# Altium PCB Onion_Omega_Debug_PCB.PcbDoc
Units mm, origin at the board's own origin, x right, y up, seen from the top; angles counter-clockwise.
Board outline 34.62 x 52.98 mm, 2 copper layers (Top, Bottom), stack 1.071 mm thick; 22 components, 37 nets, 154 pads, 0 vias.
Unrouted connection lines stored in the file: 1.
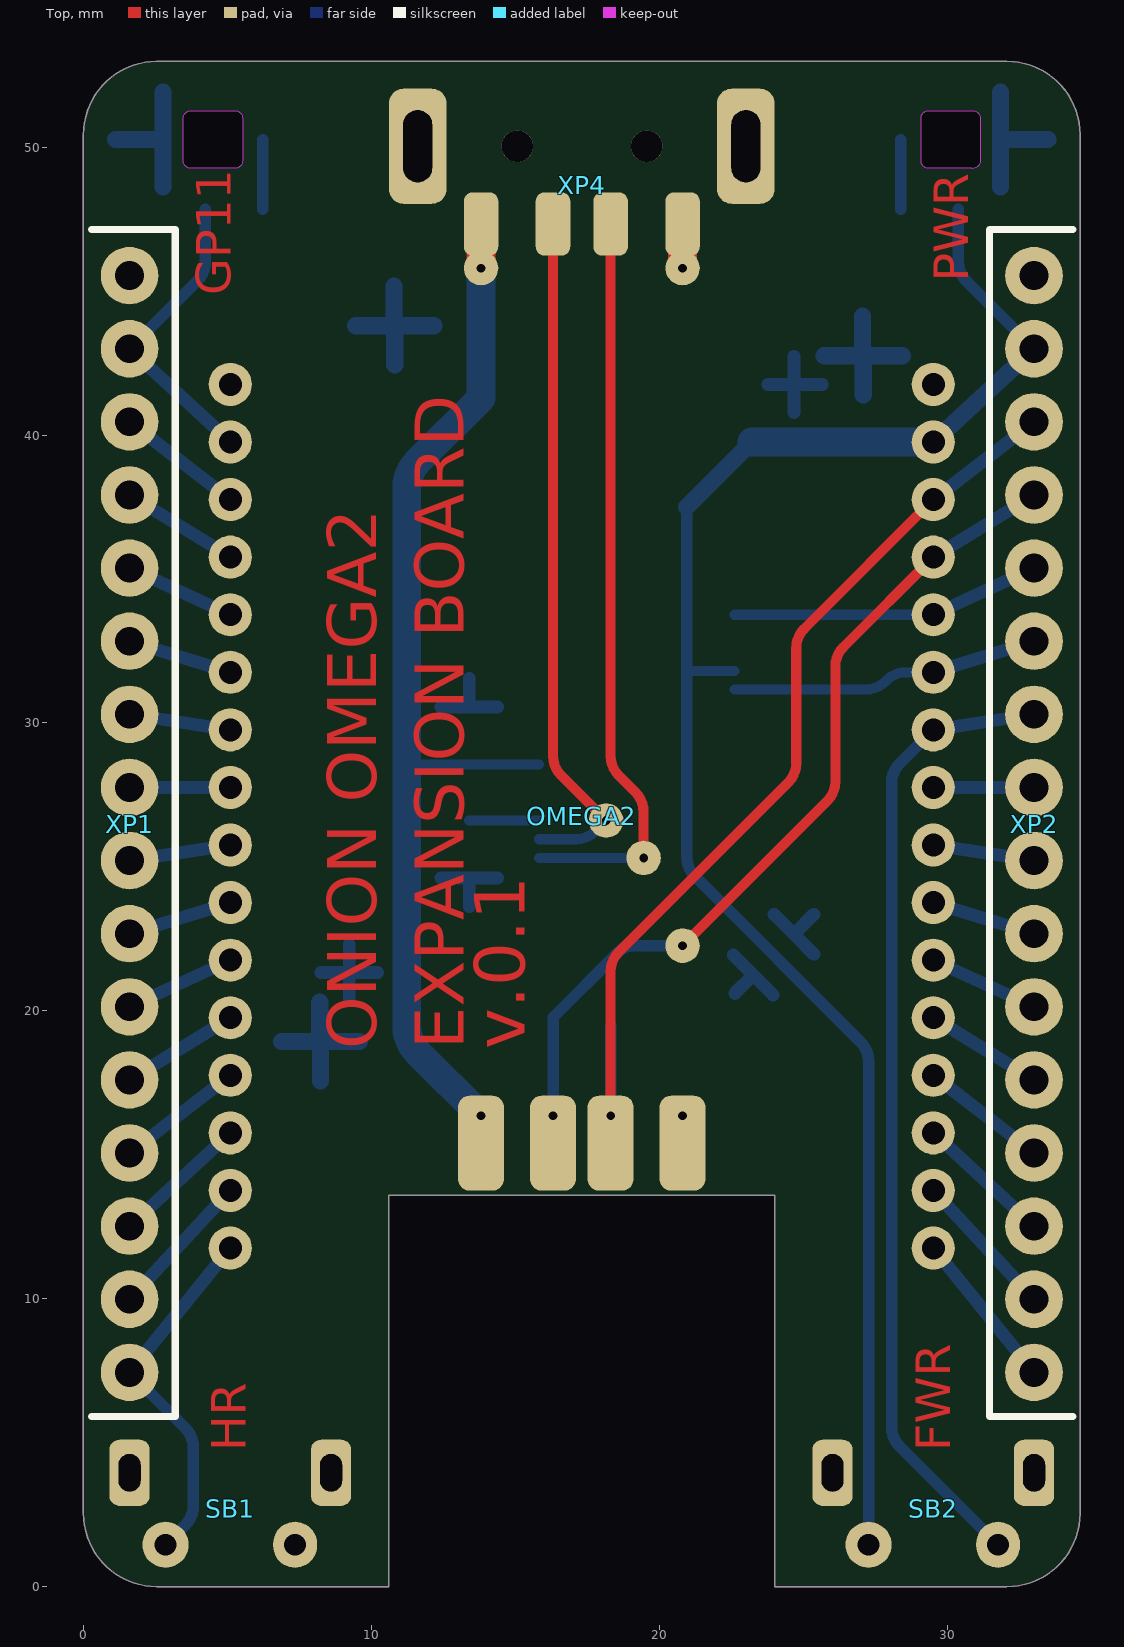
[diagram p0: Top view]
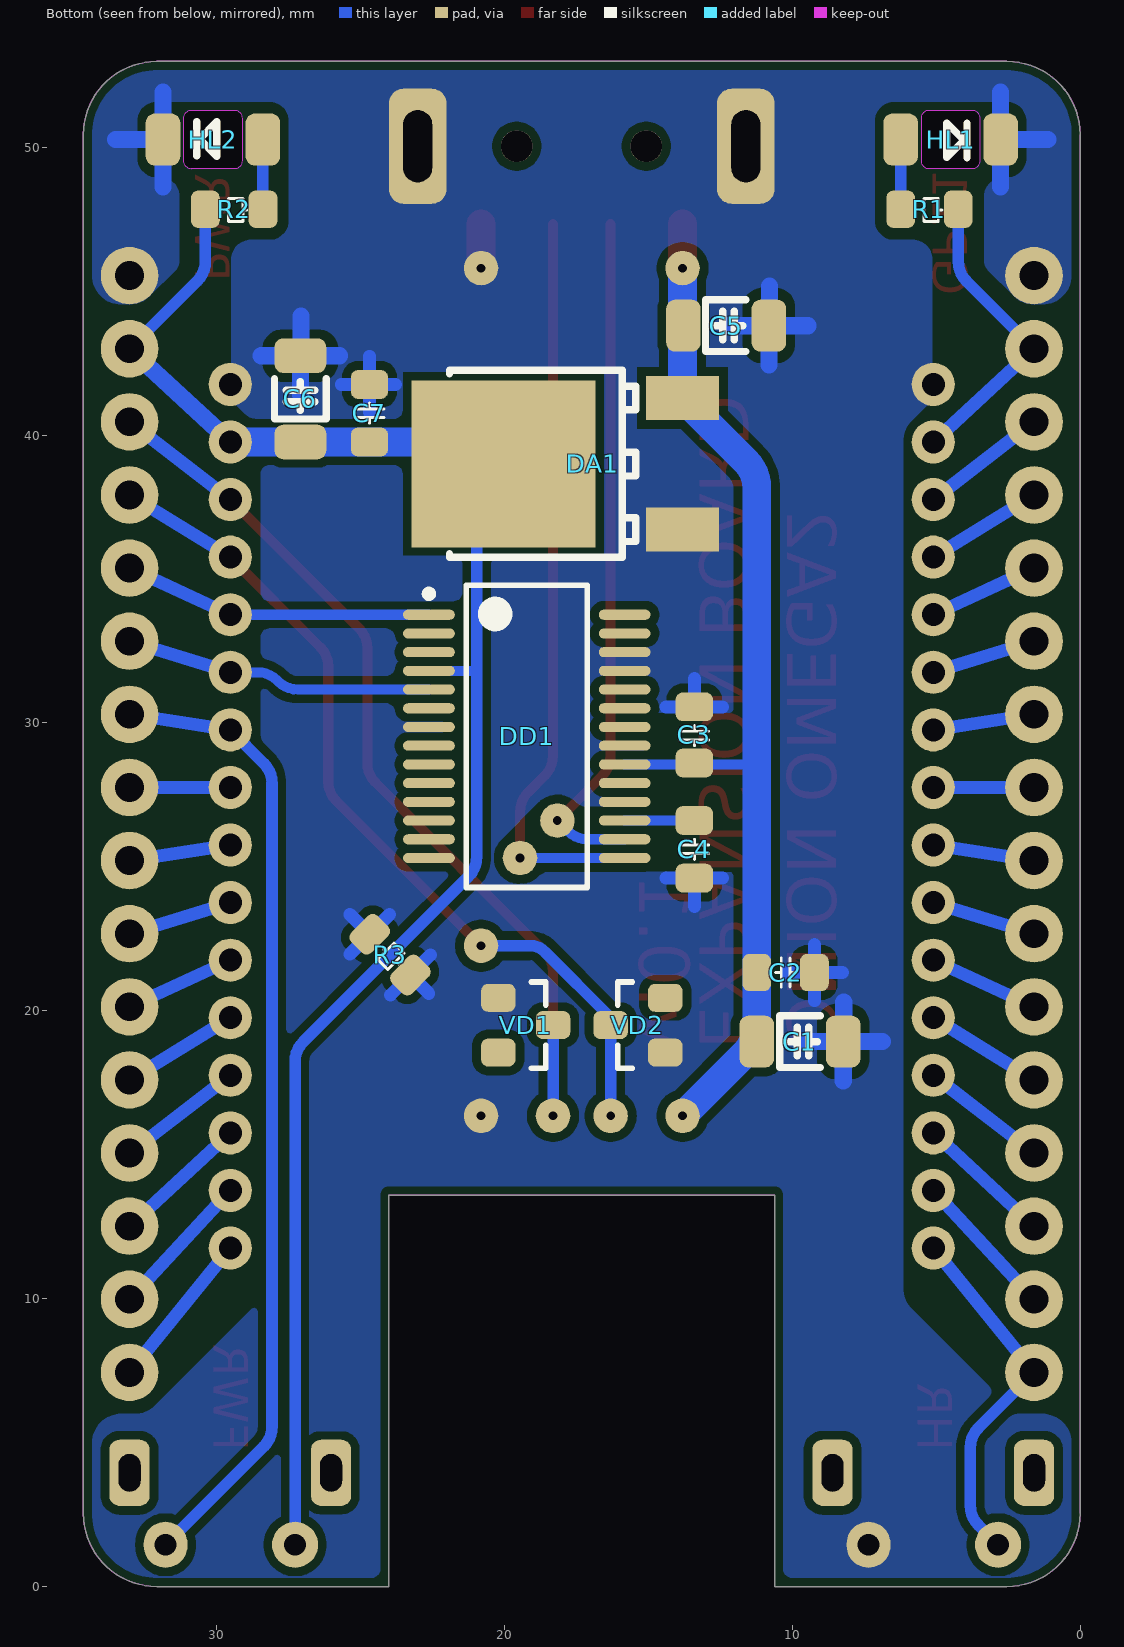
[diagram p1: Bottom view, seen from below]

## Layer stack, top to bottom
Top Solder: solder mask 0.0102, Solder Resist, Dk 3.5
Top: signal copper 0.0356
Dielectric1: core 1, FR-4, Dk 4.8
Bottom: signal copper 0.0356
Bottom Solder: solder mask 0.0102, Solder Resist, Dk 3.5

## Board outline
0,2.54 ccw(c2.54,2.54) 2.54,0 10.61,0 10.61,13.6 24.01,13.6 24.01,0 32.08,0 ccw(c32.08,2.54) 34.62,2.54 34.62,50.436 ccw(c32.08,50.436) 32.08,52.976 2.54,52.976 ccw(c2.54,50.436) 0,50.436
cut-out: 3.468,49.533 3.468,50.999 cw(c3.742,50.999) 3.742,51.273 5.252,51.273 cw(c5.252,50.999) 5.526,50.999 5.526,49.533 cw(c5.252,49.533) 5.252,49.259 3.742,49.259 cw(c3.742,49.533)
cut-out: 29.094,49.533 29.094,50.999 cw(c29.368,50.999) 29.368,51.273 30.878,51.273 cw(c30.878,50.999) 31.152,50.999 31.152,49.533 cw(c30.878,49.533) 30.878,49.259 29.368,49.259 cw(c29.368,49.533)

## Design rules (kind name [scope] priority, off if disabled: settings)
Clearance Clearance_1 [InPolygon] p1: gap=0.3 ignorepadtopadclearanceinfootprint=FALSE except(0: Arc-Hole Track-Hole SMDPad-Hole THPad-Hole Via-Hole Fill-Hole Poly-Hole Region-Hole Text-Hole)
Clearance [All] p2: gap=0.1 ignorepadtopadclearanceinfootprint=FALSE except(0: Arc-Hole Track-Hole SMDPad-Hole THPad-Hole Via-Hole Fill-Hole Poly-Hole Region-Hole Text-Hole)
PlaneConnect [All] p1: planeconnectstyle=Relief reliefexpansion=0.508 reliefentries=4 reliefconductorwidth=0.35 reliefairgap=0.254
PolygonConnect [All] p1: connectstyle=Direct reliefconductorwidth=0.5 reliefentries=4 polygonreliefangle="90 Angle" airgapwidth=0.4
RoutingVias [All] p1: holewidth=0.711 width=1.27 viastyle="Through Hole" minholewidth=0.711 minwidth=1.27 maxholewidth=5 maxwidth=5
SilkToSolderMaskClearance SilkscreenOverComponentPads [IsPad] p1: minsilkscreentomaskgap=0.254 clearancetoexposedcopper=TRUE
SolderMaskExpansion [All] p1: expansion=0.102 istentingtop=FALSE
Width [All] p1: maxlimit=10 minlimit=0.254 preferedwidth=0.254
28 further rules are at their usual default settings.

## Components (designator, comment, footprint, x,y, rotation, side; value= is the part's Value field where it differs from the comment)
C1 "10 мкФ" A-case#1 11.231,18.929 r180 bottom
C2 "100 нФ" CAP0805#1 11.231,21.329 r180 bottom
C3 "100 нФ" CAP0805#2 13.4,28.558 r90 bottom
C4 "100 нФ" CAP0805#1 13.4,24.608 r90 bottom
C5 "10 мкФ" A-case#2 13.81,43.8 r180 bottom
C6 "10 мкФ" A-case#1 27.085,39.758 r90 bottom
C7 "100 нФ" CAP0805#1 24.685,39.758 r90 bottom
DA1 "NCP1117-33G" D-PAK 20.033,39 r90 bottom
DD1 "FT232RL" SSOP-28 19.22,29.533 r180 bottom
HL1 "FYLS-1206 PGC" "LED 1206 GREEN" 5.761,50.264 r180 bottom
HL2 "FYLS-1206 UЕC" "LED 1206 RED" 28.859,50.264 r0 bottom
OMEGA2 "Onion Omega2" Onion_Omega2 29.52,11.758 r90 top
R1 "1,5 кОм" RES0805 4.233,47.843 r0 bottom
R2 "1,5 кОм" RES0805 28.387,47.843 r0 bottom
R3 "0R" RES0805 23.264,21.242 r45 bottom (schematic designator R2)
SB1 "" KLS7-TS6606 5.1,2.7 r0 top
SB2 "" KLS7-TS6606 29.52,2.7 r0 top
VD1 "" SOT-23 18.31,19.5 r180 bottom
VD2 "" SOT-23 16.31,19.5 r0 bottom
XP1 "PBS-16" PBS-16 1.6,7.438 r90 top
XP2 "PBS-16" PBS-16 33.02,7.438 r90 top
XP4 "USBA-M-SM" USBA-M-SM 13.81,47.332 r270 top

## Footprints (in the part's own frame and the unit in brackets; to place one, negate y for a bottom-side part, rotate by r counter-clockwise, add the part's x,y. Pads: shape width x height; smd on the part's side, far side on the other; paste and mask are expansions set on the pad)
A-case#1 [mm]
  rrect50% 1.2x1.8 smd mask-25.4: 1(0,0) 2(3,0)
  silkscreen extent 0.8,-0.9 2.2,0.9, body extent -0.1,-0.8 3.1,0.8, height 1.8
A-case#2 [mm]
  rrect50% 1.2x1.8 smd mask-25.4: 1(0.032,0) 2(3,0)
  silkscreen extent 0.8,-0.9 2.2,0.9, body extent -0.1,-0.8 3.1,0.8, height 1.8
CAP0805#1 [mm]
  rrect50% 1x1.3 smd: 1(0,0) 2(2,0)
  silkscreen extent 0.65,-0.5 1.35,0.5, body extent 0.02,-0.63 2.02,0.62, height 0.78
CAP0805#2 [mm]
  rrect50% 1x1.3 smd: 1(0.048,0) 2(2,0)
  silkscreen extent 0.65,-0.5 1.35,0.5, body extent 0.02,-0.63 2.02,0.62, height 0.78
D-PAK [mil]
  rect 60x100 smd: 1(-90,-245) 3(90,-245)
  rect 228.35x251.97 smd: 2(0,0)
  silkscreen extent -128,-181 128,74, body extent -128,-275 128,124, height 96
KLS7-TS6606 [mm]
  round 1.6 hole 0.762: 1(-2.25,-1.25)
  oval 1.524x1.6 hole 0.762: 2(2.25,-1.25)
  rrect50% 1.4x2.3 hole 0.762 slot 1.3 at 90 deg: 3(3.5,1.25) 4(-3.5,1.25)
  body extent -4.1,-9.7 4.1,2.65, height 7.8
"LED 1206 GREEN" [mm]
  rrect50% 1.2x1.8 smd mask-25.4: 1(-0.472,0) 2(3,0)
  silkscreen extent 1.13,-0.63 1.83,0.58, body extent -0.1,-0.8 3.1,0.8, height 1.1
"LED 1206 RED" [mm]
  rrect50% 1.2x1.8 smd mask-25.4: 1(-0.472,0) 2(3,0)
  silkscreen extent 1.13,-0.63 1.83,0.58, body extent -0.1,-0.8 3.1,0.8, height 1.1
Onion_Omega2 [mm]
  round 1.5 hole 0.8: 1(0,24.42) 2(2,24.42) 3(4,24.42) 4(6,24.42) 5(8,24.42) 6(10,24.42) 7(12,24.42) 8(14,24.42) 9(16,24.42) 10(18,24.42) 11(20,24.42) 12(22,24.42) 13(24,24.42) 14(26,24.42) 15(28,24.42) 16(30,24.42) 17(30,0) 18(28,0) 19(26,0) 20(24,0) 21(22,0) 22(20,0) 23(18,0) 24(16,0) 25(14,0) 26(12,0) 27(10,0) 28(8,0) 29(6,0) 30(4,0) 31(2,0) 32(0,0)
  body extent -5.3,-0.96 37.6,25.44, height 9.4
PBS-16 [mm]
  round 2 hole 1: 1(0,0) 2(2.54,0) 3(5.08,0) 4(7.62,0) 5(10.16,0) 6(12.7,0) 7(15.24,0) 8(17.78,0) 9(20.32,0) 10(22.86,0) 11(25.4,0) 12(27.94,0) 13(30.48,0) 14(33.02,0) 15(35.56,0) 16(38.1,0)
  silkscreen extent -1.53,-1.59 39.7,1.31, body extent -1.24,-1.3 39.4,1.24, height 8.17
RES0805 [mm]
  rrect50% 1x1.3 smd: 1(0,0) 2(2,0)
  silkscreen extent 0.56,-0.38 1.31,0.42, body extent -0.1,-0.6 1.9,0.6, height 0.5
SOT-23 [mm]
  rrect50% 1.2x0.972 smd: 1(-1.9,0.95) 2(-1.9,-0.95) 3(0,0)
  silkscreen extent -0.75,-1.5 -0.25,1.5, body extent -2.15,-1.5 0.15,1.5, height 1.1
SSOP-28 [mm]
  oval 1.8x0.35 smd: 1(-3.4,4.225) 2(-3.4,3.575) 3(-3.4,2.925) 4(-3.4,2.275) 5(-3.4,1.625) 6(-3.4,0.975) 7(-3.4,0.325) 8(-3.4,-0.325) 9(-3.4,-0.975) 10(-3.4,-1.625) 11(-3.4,-2.275) 12(-3.4,-2.925) 13(-3.4,-3.575) 14(-3.4,-4.225) 15(3.4,-4.225) 16(3.4,-3.575) 17(3.4,-2.925) 18(3.4,-2.275) 19(3.4,-1.625) 20(3.4,-0.975) 21(3.4,-0.325) 22(3.4,0.325) 23(3.4,0.975) 24(3.4,1.625) 25(3.4,2.275) 26(3.4,2.925) 27(3.4,3.575) 28(3.4,4.225)
  silkscreen extent -3.52,-5.25 2.1,5.25, body extent -3.9,-5.1 3.9,5.1, height 1.9
USBA-M-SM [mm]
  rrect50% 2.2x1.2 smd paste-25.4: 1(0,0) 2(0,2.5) 3(0,4.5) 4(0,7)
  round 1.1 hole 1.1 unplated: 1mm(-2.7,5.76) 1mm(-2.7,1.26)
  rrect50% 4x2 hole 1 slot 2.5 at 0 deg unplated: 5(-2.7,-2.2) 6(-2.7,9.2)
  body extent -20.4,-2.69 0.3,9.81, height 3.22

## Part data
C1 C5 C6: library part 871, "10 мкФ 10 В 10% тип А", Part number=A-case, ID 1C=871, Mounting method=SMD, Subtype=танталовый, Type=конденсатор
C2 C3 C4 C7: library part 1002, "100 нФ  5% X7R", ID 1C=1002, Mounting method=SMD, Subtype=0805, Type=конденсатор
DA1: library part D0, ID 1C=D0, Part number=NCP1117-33G, Subtype="стабилизатор напряжения", Type=микросхема
DD1: library part 1752, ID 1C=1752, Mounting method=SMD, Part number=FT232RL, Subtype="контроллер интерфейсов", Type=микросхема
HL1: library part 1946, "зеленый сверхяркий", ID 1C=1946, Mounting method=SMD, Part number="FYLS-1206 PGC", Subtype=1206, Type=светодиод
HL2: library part 1053, "красный", ID 1C=1053, Mounting method=SMD, Part number="FYLS-1206 UЕC", Subtype=1206, Type=светодиод
OMEGA2: library part D3, ID 1C=D3, Part number="Onion Omega2", Type=DIY
R1 R2: library part 1788, ID 1C=1788, Mounting method=SMD, Subtype=0805, Type=резистор
R3: library part 1788, "1,5 кОм", ID 1C=1788, Mounting method=SMD, Subtype=0805, Type=резистор
SB1 SB2: library part 2117, "6x6x3.85", Part number=KLS7-TS6606-5.0, ID 1C=2117, Mounting method=THT, Type=кнопка
VD1 VD2: library part 1010, Part number=BZX84-C3V6, ID 1C=1010, Type=стабилитрон
XP1 XP2: library part D2, Part number="PBS-16 2.54mm", ID 1C=D2, Type=разъем
XP4: library part 998, Part number="разъем USBA-M-SM", ID 1C=998, Type=разъем

## Free pads (board coordinates)
  round 1.2 hole 0.3: 2(13.81,16.35) 2(13.81,45.8) 2(16.31,16.35) 2(18.157,26.608) 2(18.31,16.35) 2(19.457,25.308) 2(20.81,22.259) 2(20.81,45.8) 2(20.81,16.35)
  rrect50% 1.6x3.3 smd: 3(13.81,15.4) 3(16.31,15.4) 3(18.31,15.4) 3(20.81,15.4)

## Nets (pads, with @x,y where several pads share a name; then routed paths per layer and width w, separated by ;. In a path a pad name is that pad's centre, name@x,y a point inside that pad or via, vN(x,y) a via of type N, cw(c..) or ccw(c..) an arc to the next point about the centre after c; other vN are vias at no path point)
+3.3V: C6.1 C7.1 DA1.2 DD1.4 OMEGA2.18 R2.2 SB2.1 XP2.15 | length 60.4
  Bottom w0.35: 20.968,31.808 DD1.4
  Bottom w0.4: DA1.2@20.956,37.498 20.956,25.352 ccw(c21.922,25.352) 21.239,24.669 26.987,18.921 cw(c26.305,18.239) 27.27,18.239 SB2.1 ; R2.2 30.387,46.031 ccw(c31.352,46.031) 30.669,45.349 XP2.15
  Bottom w0.6: DA1.2@20.956,37.498 DA1.2@23.216,39.758 ; OMEGA2.18 XP2.15
  Bottom w1: DA1.2@23.216,39.758 OMEGA2.18
+5V: C1.1 C2.1 C3.1 C5.1 DA1.3 DD1.20 pad.2@13.81,16.35 pad.2@13.81,45.8 pad.3@13.81,15.4 XP4.1 | length 37.5
  Top w1: pad.2@13.81,45.8 XP4.1
  Bottom w0.35: 11.371,28.558 DD1.20
  Bottom w1: pad.2@13.81,16.35 11.618,18.542 cw(c12.552,19.476) 11.231,19.476 11.231,38.16 cw(c12.552,38.16) 11.618,39.094 DA1.3 pad.2@13.81,45.8
CS1: OMEGA2.4 XP1.4 | length 4.4
  Bottom w0.45: XP1.4 OMEGA2.4
D+: OMEGA2.19 pad.2@18.31,16.35 pad.3@18.31,15.4 VD1.3 XP2.14 | length 33.5
  Top w0.35: pad.2@18.31,16.35 18.31,21.36 cw(c19.275,21.36) 18.593,22.043 24.478,27.928 ccw(c23.796,28.611) 24.761,28.611 24.761,32.599 cw(c25.726,32.599) 25.044,33.282 OMEGA2.19
  Bottom w0.4: pad.2@18.31,16.35 VD1.3
  Bottom w0.45: OMEGA2.19 XP2.14
D-: OMEGA2.20 pad.2@16.31,16.35 pad.2@20.81,22.259 pad.3@16.31,15.4 VD2.3 XP2.13 | length 30.1
  Top w0.35: pad.2@20.81,22.259 25.835,27.285 ccw(c25.153,27.967) 26.118,27.967 26.118,31.956 cw(c27.083,31.956) 26.401,32.639 OMEGA2.20
  Bottom w0.4: pad.2@16.31,16.35 16.31,19.767 18.594,22.051 cw(c19.098,21.546) 19.098,22.259 pad.2@20.81,22.259
  Bottom w0.45: OMEGA2.20 XP2.13
FW_RST: OMEGA2.23 SB2.2 XP2.10 | length 33.9
  Bottom w0.4: OMEGA2.23 28.355,28.593 ccw(c29.037,27.91) 28.072,27.91 28.072,5.548 ccw(c29.037,5.548) 28.355,4.865 SB2.2
  Bottom w0.45: OMEGA2.23 XP2.10
GND: C1.2 C2.2 C3.2 C4.1 C5.2 C6.2 C7.2 DA1.1 DD1.7 DD1.18 DD1.21 DD1.25 DD1.26 HL1.2 HL2.2 OMEGA2.16 OMEGA2.17 pad.2@20.81,16.35 pad.2@20.81,45.8 pad.3@20.81,15.4 R3.1 R3.2 SB1.2 VD1.1 VD2.1 XP1.16 XP2.16 XP4.4 XP4.5 XP4.6 | length 47.1
  Top w1: pad.2@20.81,45.8 XP4.4
  Bottom w0.448: 8.251,21.329 C2.2 ; 9.231,20.349 C2.2 ; 9.231,22.309 C2.2 ; 10.211,21.329 C2.2 ; 12.42,24.608 C4.1 ; 12.42,30.558 C3.2 ; 13.4,23.628 C4.1 ; 13.4,31.538 C3.2 ; 14.38,24.608 C4.1 ; 14.38,30.558 C3.2 ; 22.571,21.935 R3.1 ; 22.627,20.606 R3.1 ; 23.785,41.758 C7.2 ; 23.957,20.55 R3.1 ; 23.985,23.349 R3.2 ; 24.685,40.778 C7.2 ; 24.685,42.738 C7.2 ; 25.371,21.964 R3.2 ; 25.371,23.349 R3.2 ; 25.665,41.758 C7.2
  Bottom w0.6: 1.121,50.264 HL1.2 ; 2.761,48.624 HL1.2 ; 2.761,51.905 HL1.2 ; 6.875,18.929 C1.2 ; C1.2@8.206,18.943 8.206,20.3 ; 8.231,17.573 C1.2 ; 9.454,43.8 C5.2 ; 9.587,18.929 C1.2 ; C5.2@10.786,43.814 10.786,45.171 ; 10.81,42.444 C5.2 ; 12.166,43.8 C5.2 ; 25.729,42.758 C6.2 ; C6.2@27.061,42.772 27.061,44.129 ; 27.085,41.402 C6.2 ; 28.441,42.758 C6.2 ; 31.859,48.624 HL2.2 ; 31.859,51.904 HL2.2 ; 33.499,50.264 HL2.2
GPIO11: OMEGA2.15 R1.1 XP1.15 | length 10.7
  Bottom w0.4: XP1.15 3.951,45.349 ccw(c3.268,46.031) 4.233,46.031 R1.1
  Bottom w0.45: XP1.15 OMEGA2.15
GPIO15: OMEGA2.10 XP1.10 | length 3.5
  Bottom w0.45: XP1.10 OMEGA2.10
GPIO16: OMEGA2.11 XP1.11 | length 3.7
  Bottom w0.45: XP1.11 OMEGA2.11
GPIO17: OMEGA2.12 XP1.12 | length 3.9
  Bottom w0.45: XP1.12 OMEGA2.12
GPIO18: OMEGA2.29 XP2.4 | length 4.4
  Bottom w0.45: OMEGA2.29 XP2.4
GPIO19: OMEGA2.30 XP2.3 | length 4.8
  Bottom w0.45: OMEGA2.30 XP2.3
I2S_CLK: OMEGA2.14 XP1.14 | length 4.4
  Bottom w0.45: XP1.14 OMEGA2.14
MISO: OMEGA2.7 XP1.7 | length 3.7
  Bottom w0.45: XP1.7 OMEGA2.7
MOSI: OMEGA2.6 XP1.6 | length 3.9
  Bottom w0.45: XP1.6 OMEGA2.6
NetC4_2: C4.2 DD1.17 | length 2.4
  Bottom w0.35: C4.2 DD1.17
NetHL1_1: HL1.1 R1.2 | length 2.4
  Bottom w0.4: R1.2 HL1.1
NetHL2_1: HL2.1 R2.1 | length 2.4
  Bottom w0.4: R2.1 HL2.1@28.387,50.264
RST: OMEGA2.1 SB1.1 XP1.1 | length 12.8
  Bottom w0.4: XP1.1 3.534,5.504 cw(c2.851,4.822) 3.817,4.822 3.817,2.816 cw(c2.851,2.816) 3.534,2.134 SB1.1
  Bottom w0.45: XP1.1 OMEGA2.1
RX0: DD1.1 OMEGA2.21 XP2.12 | length 10.8
  Bottom w0.35: DD1.1 OMEGA2.21
  Bottom w0.45: OMEGA2.21 XP2.12
RX1: OMEGA2.9 XP1.9 | length 3.5
  Bottom w0.45: XP1.9 OMEGA2.9
RX+: OMEGA2.28 XP2.5 | length 4.1
  Bottom w0.45: OMEGA2.28 XP2.5
RX-: OMEGA2.27 XP2.6 | length 3.9
  Bottom w0.45: OMEGA2.27 XP2.6
SCL: OMEGA2.31 XP2.2 | length 5.2
  Bottom w0.45: OMEGA2.31 XP2.2
SDA: OMEGA2.32 XP2.1 | length 5.6
  Bottom w0.45: OMEGA2.32 XP2.1
SDI: OMEGA2.2 XP1.2 | length 5.2
  Bottom w0.45: XP1.2 OMEGA2.2
SDO: OMEGA2.3 XP1.3 | length 4.8
  Bottom w0.45: XP1.3 OMEGA2.3
SPI_CLK: OMEGA2.5 XP1.5 | length 4.1
  Bottom w0.45: XP1.5 OMEGA2.5
TX0: DD1.5 OMEGA2.22 XP2.11 | length 10.7
  Bottom w0.35: DD1.5 27.174,31.158 ccw(c27.174,32.123) 27.857,31.441 27.891,31.475 cw(c28.574,30.793) 28.574,31.758 OMEGA2.22
  Bottom w0.45: OMEGA2.22 XP2.11
TX1: OMEGA2.8 XP1.8 | length 3.5
  Bottom w0.45: XP1.8 OMEGA2.8
TX+: OMEGA2.26 XP2.7 | length 3.7
  Bottom w0.45: OMEGA2.26 XP2.7
TX-: OMEGA2.25 XP2.8 | length 3.5
  Bottom w0.45: OMEGA2.25 XP2.8
USB_DM: DD1.16 pad.2@18.157,26.608 XP4.2 | length 24
  Top w0.35: XP4.2 16.31,28.855 ccw(c17.275,28.855) 16.593,28.173 pad.2@18.157,26.608
  Bottom w0.35: DD1.16 17.107,25.958 ccw(c17.107,26.923) 17.79,26.241 pad.2@18.157,26.608
USB_DP: DD1.15 pad.2@19.457,25.308 XP4.3 | length 26.1
  Top w0.35: XP4.3 18.31,28.855 ccw(c19.275,28.855) 18.593,28.172 19.174,27.591 cw(c18.492,26.908) 19.457,26.908 pad.2@19.457,25.308
  Bottom w0.35: DD1.15 pad.2@19.457,25.308
V_OUT: OMEGA2.24 XP2.9 | length 3.5
  Bottom w0.45: OMEGA2.24 XP2.9
WS: OMEGA2.13 XP1.13 | length 4.1
  Bottom w0.45: XP1.13 OMEGA2.13
pads on no net: DD1.2 DD1.3 DD1.6 DD1.8 DD1.9 DD1.10 DD1.11 DD1.12 DD1.13 DD1.14 DD1.19 DD1.22 DD1.23 DD1.24 DD1.27 DD1.28 SB1.3 SB1.4 SB2.3 SB2.4 VD1.2 VD2.2 XP4.1mm

## Polygon pours and split planes (outlines as drawn)
GND on Bottom "GND" (solid, pour order 0): 0,2.54 0,50.436 cw(c2.54,50.436) 2.54,52.976 32.08,52.976 cw(c32.08,50.436) 34.62,50.436 34.62,2.54 cw(c32.08,2.54) 32.08,0 24.01,0 24.01,13.6 10.61,13.6 10.61,0 2.54,0 cw(c2.54,2.54)

## Keep-outs
Keep-Out Layer:
  the board outline again, w0

## Other copper
Top:
  text "PWR" at 30.738,45.332 h1.2 r90
  text "GP11" at 5.115,44.86 h1.2 r90
  text "ONION OMEGA2" at 10.169,18.655 h1.7 r90
  text "EXPANSION BOARD" at 13.208,18.656 h1.7 r90
  text "v.0.1" at 15.895,18.655 h3 r90
  text "HR" at 5.644,4.698 h1.2 r90
  text "FWR" at 30.103,4.698 h1.2 r90
Bottom:
  pour cut-out: 24.113,20.747 ccw(c23.725,21.136) 24.113,21.524 23.546,22.092 ccw(c23.157,21.703) 22.769,22.092 22.414,21.738 ccw(c22.803,21.349) 22.414,20.961 22.982,20.393 ccw(c23.371,20.781) 23.759,20.393
  pour cut-out: 25.528,22.161 ccw(c25.139,22.55) 25.528,22.938 24.96,23.506 ccw(c24.571,23.118) 24.183,23.506 23.829,23.152 ccw(c24.217,22.763) 23.829,22.375 24.396,21.807 ccw(c24.785,22.196) 25.173,21.807
  pour cut-out: 12.449,24.357 12.449,24.832 12.2,24.832 ccw(c12.2,24.664) 12.032,24.664 12.032,30.502 ccw(c12.2,30.502) 12.2,30.334 12.449,30.334 12.449,30.809 cw(c12.999,30.809) 12.999,31.358 13.801,31.358 cw(c13.801,30.809) 14.351,30.809 14.351,30.334 15.138,30.334 15.138,27.083 17.13,27.083 ccw(c17.13,27.635) 17.521,27.245 cw(c18.157,26.608) 18.794,27.245 20.094,25.945 cw(c19.457,25.308) 18.82,24.671 ccw(c18.431,24.282) 18.431,24.832 14.351,24.832 14.351,24.357 cw(c13.801,24.357) 13.801,23.808 12.999,23.808 cw(c12.999,24.357)
  pour cut-out: 0.301,5 cw(c1.301,5) 1.301,6 2.147,6 cw(c2.147,5.557) 2.46,5.87 3.168,6.578 cw(c3.365,6.775) 3.168,6.972 5.843,9.647 ccw(c5.1,10.39) 6.151,10.39 6.151,39.758 ccw(c5.1,39.758) 5.843,40.501 5.133,41.211 5.133,46.109 cw(c5.807,46.109) 5.807,46.783 6.46,46.783 ccw(c6.46,47.457) 7.134,47.457 7.134,50.9 ccw(c6.46,50.9) 6.46,51.574 2.534,51.574 ccw(c2.534,50.9) 1.86,50.9 1.86,49.628 ccw(c2.534,49.628) 2.534,48.954 2.659,48.954 cw(c2.659,48.281) 3.333,48.281 3.333,46.04 cw(c2.89,46.04) 3.203,45.727 2.307,44.831 cw(c1.6,45.538) 1.6,44.538 1.301,44.538 cw(c1.301,45.538) 0.301,45.538
  pour cut-out: 27.771,4.453 27.771,4.819 27.975,4.539 ccw(c27.891,4.452)
  pour cut-out: 27.367,19.248 ccw(c27.451,19.335) 27.571,19.333 27.571,18.968
  pour cut-out: 21.731,24.886 21.989,24.628 cw(c22.075,24.712) 22.073,24.832
  pour cut-out: 24.311,0.301 24.311,0.601 ccw(c24.611,0.601) 24.611,0.301
  pour cut-out: 10.009,0.301 ccw(c10.009,0.601) 10.309,0.601 10.309,0.301
  pour cut-out: 21.457,33.937 21.896,34.234 21.757,34.234 cw(c21.757,34.534) 21.457,34.534
  pour cut-out: 21.457,35.8 21.757,35.8 ccw(c21.757,35.5) 21.457,35.5
  pour cut-out: 20.156,35.8 cw(c20.156,35.5) 20.456,35.5 20.456,35.8
  pour cut-out: 23.533,38.657 23.533,38.957 23.833,38.957 ccw(c23.833,38.657)
  pour cut-out: 23.533,40.559 23.533,40.859 ccw(c23.833,40.859) 23.833,40.559
  pour cut-out: 28.242,32.195 ccw(c28.168,32.486) 28.469,32.485 28.469,32.982 ccw(c28.169,32.982) 28.169,33.282 28.469,33.282 28.469,34.234 28.169,34.234 ccw(c28.169,34.534) 28.469,34.534 28.469,38.657 ccw(c28.169,38.657) 28.169,38.957 28.469,38.957 28.469,40.559 28.606,40.559 ccw(c28.606,41.111) 28.996,40.721 29.487,41.211 29.487,46.109 ccw(c28.813,46.109) 28.813,46.783 28.16,46.783 cw(c28.16,47.457) 27.486,47.457 27.486,50.9 cw(c28.16,50.9) 28.16,51.574 32.086,51.574 cw(c32.086,50.9) 32.76,50.9 32.76,49.628 cw(c32.086,49.628) 32.086,48.954 31.961,48.954 ccw(c31.961,48.28) 31.287,48.28 31.287,46.04 ccw(c31.73,46.04) 31.417,45.727 32.313,44.831 ccw(c33.02,45.538) 33.02,44.538 33.319,44.538 ccw(c33.319,45.538) 34.319,45.538 34.319,4.999 ccw(c33.319,4.999) 33.319,6 32.859,6 cw(c32.859,7.05) 32.116,6.307 28.777,9.646 ccw(c28.693,9.56) 28.573,9.561 28.573,9.934 cw(c29.52,10.39) 28.469,10.389 28.469,29.254 28.307,29.254 ccw(c27.917,29.644) 28.469,29.644 28.469,31.043 ccw(c28.328,31.041) 28.242,31.153
  pour cut-out: 23.776,33.282 24.11,33.282 ccw(c24.12,32.969) 23.814,33.033
  pour cut-out: 23.776,31.634 24.11,31.634 cw(c24.12,31.947) 23.814,31.883
  pour cut-out: 23.776,30.682 24.11,30.682 ccw(c24.12,30.369) 23.814,30.433
  pour cut-out: 7.33,18.293 ccw(c8.004,18.293) 8.004,17.619 8.458,17.619 ccw(c8.458,18.293) 9.132,18.293 9.132,19.565 ccw(c8.458,19.565) 8.458,20.239 8.004,20.239 ccw(c8.004,19.565) 7.33,19.565
  pour cut-out: 9.909,43.164 9.909,44.436 cw(c10.583,44.436) 10.583,45.11 11.037,45.11 cw(c11.037,44.436) 11.711,44.436 11.711,43.164 cw(c11.037,43.164) 11.037,42.49 10.583,42.49 cw(c10.583,43.164)
  pour cut-out: 8.431,20.928 8.431,21.73 cw(c8.98,21.73) 8.98,22.28 9.482,22.28 cw(c9.482,21.73) 10.031,21.73 10.031,20.928 cw(c9.482,20.928) 9.482,20.378 8.98,20.378 cw(c8.98,20.928)
  pour cut-out: 23.734,41.507 ccw(c24.284,41.507) 24.284,40.958 25.086,40.958 ccw(c25.086,41.507) 25.636,41.507 25.636,42.009 ccw(c25.086,42.009) 25.086,42.558 24.284,42.558 ccw(c24.284,42.009) 23.734,42.009
  pour cut-out: 25.775,42.531 ccw(c26.449,42.531) 26.449,41.857 27.721,41.857 ccw(c27.721,42.531) 28.395,42.531 28.395,42.985 ccw(c27.721,42.985) 27.721,43.659 26.449,43.659 ccw(c26.449,42.985) 25.776,42.985
  pour cut-out: 21.32,29.208 22.141,29.208 22.141,30.508 21.32,30.508

## Silkscreen, mask and mechanical layers (free items; w line width, h text height)
Mechanical 2:
  drawing of 184 lines, arcs and shapes, not listed
Outline:
  the board outline again, w0
Mechanical 13:
  lines w0: 0,2.54 ccw(c2.54,2.54) 2.54,0 10.61,0 10.61,13.6 24.01,13.6 24.01,0 32.08,0 ccw(c32.08,2.54) 34.62,2.54 34.62,50.436 ccw(c32.08,50.436) 32.08,52.976 2.54,52.976 ccw(c2.54,50.436) 0,50.436 0,2.54 ; 3.468,49.533 ccw(c3.742,49.533) 3.742,49.259 5.252,49.259 ccw(c5.252,49.533) 5.526,49.533 5.526,50.999 ccw(c5.252,50.999) 5.252,51.273 3.742,51.273 ccw(c3.742,50.999) 3.468,50.999 3.468,49.533 ; 29.094,49.533 ccw(c29.368,49.533) 29.368,49.259 30.878,49.259 ccw(c30.878,49.533) 31.152,49.533 31.152,50.999 ccw(c30.878,50.999) 30.878,51.273 29.368,51.273 ccw(c29.368,50.999) 29.094,50.999 29.094,49.533